# Altium PCB A3000_BigROMs.pcbdoc
Units mil, origin at the board's own origin, x right, y up, seen from the top; angles counter-clockwise.
Board outline 1725 x 3107.48 mil, 4 copper layers (TopLayer, GND, VCC, BottomLayer), stack 70.897 mil thick; 7 components, 56 nets, 144 pads, 65 vias.
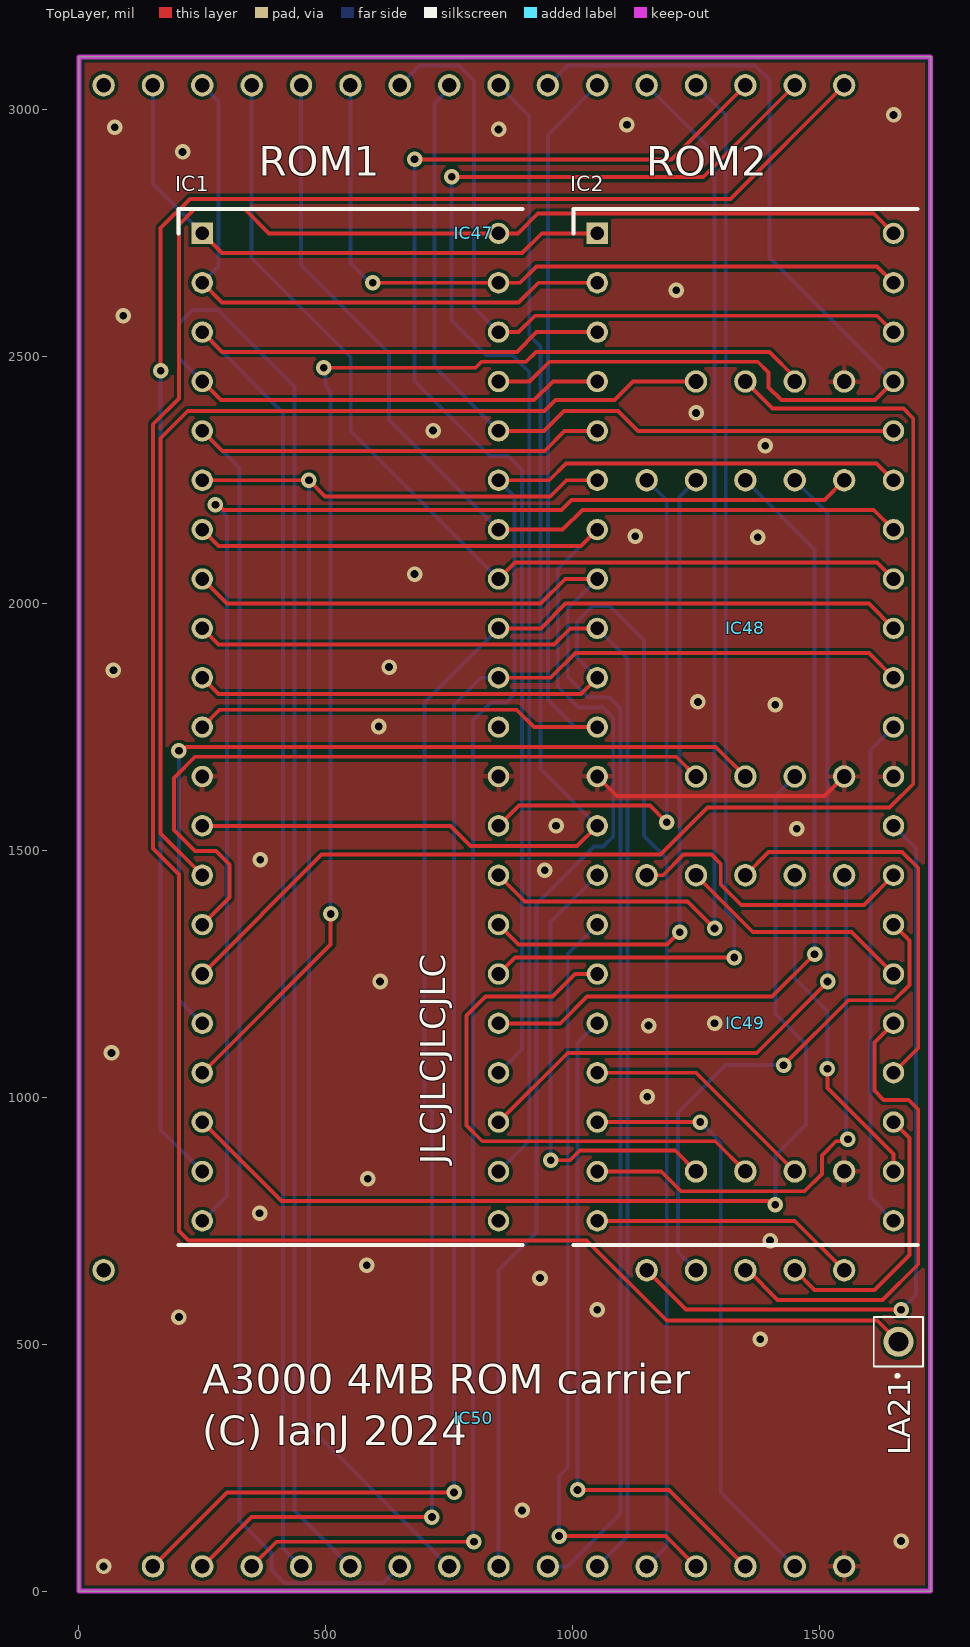
[diagram p0: TopLayer view]
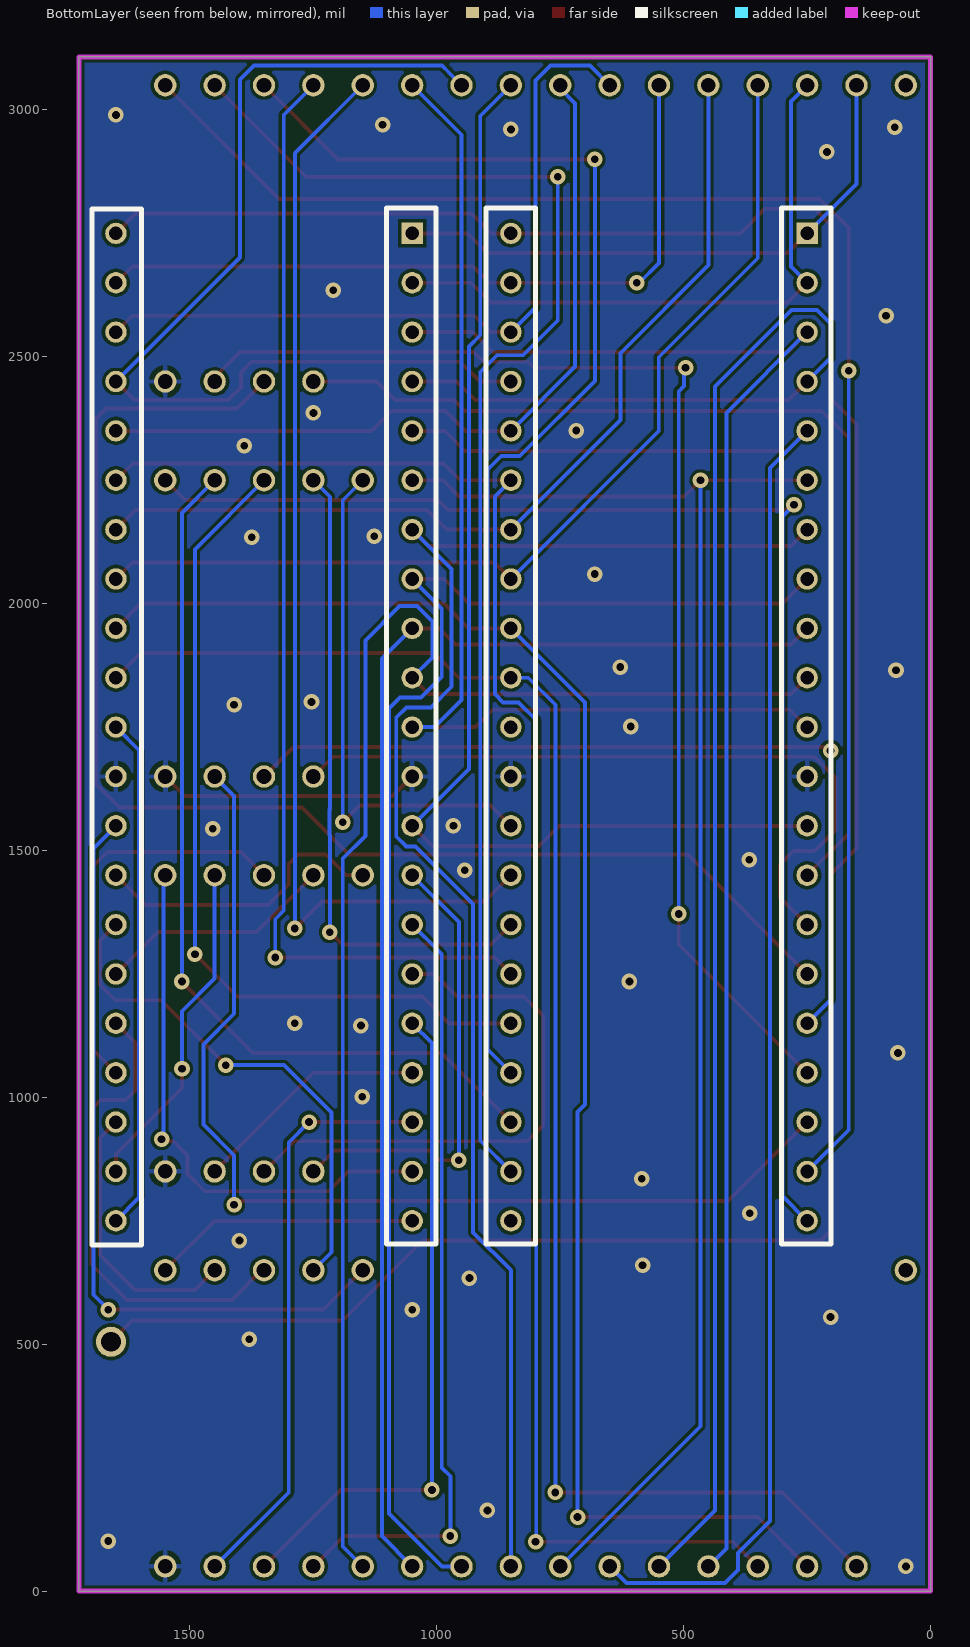
[diagram p1: BottomLayer view, seen from below]
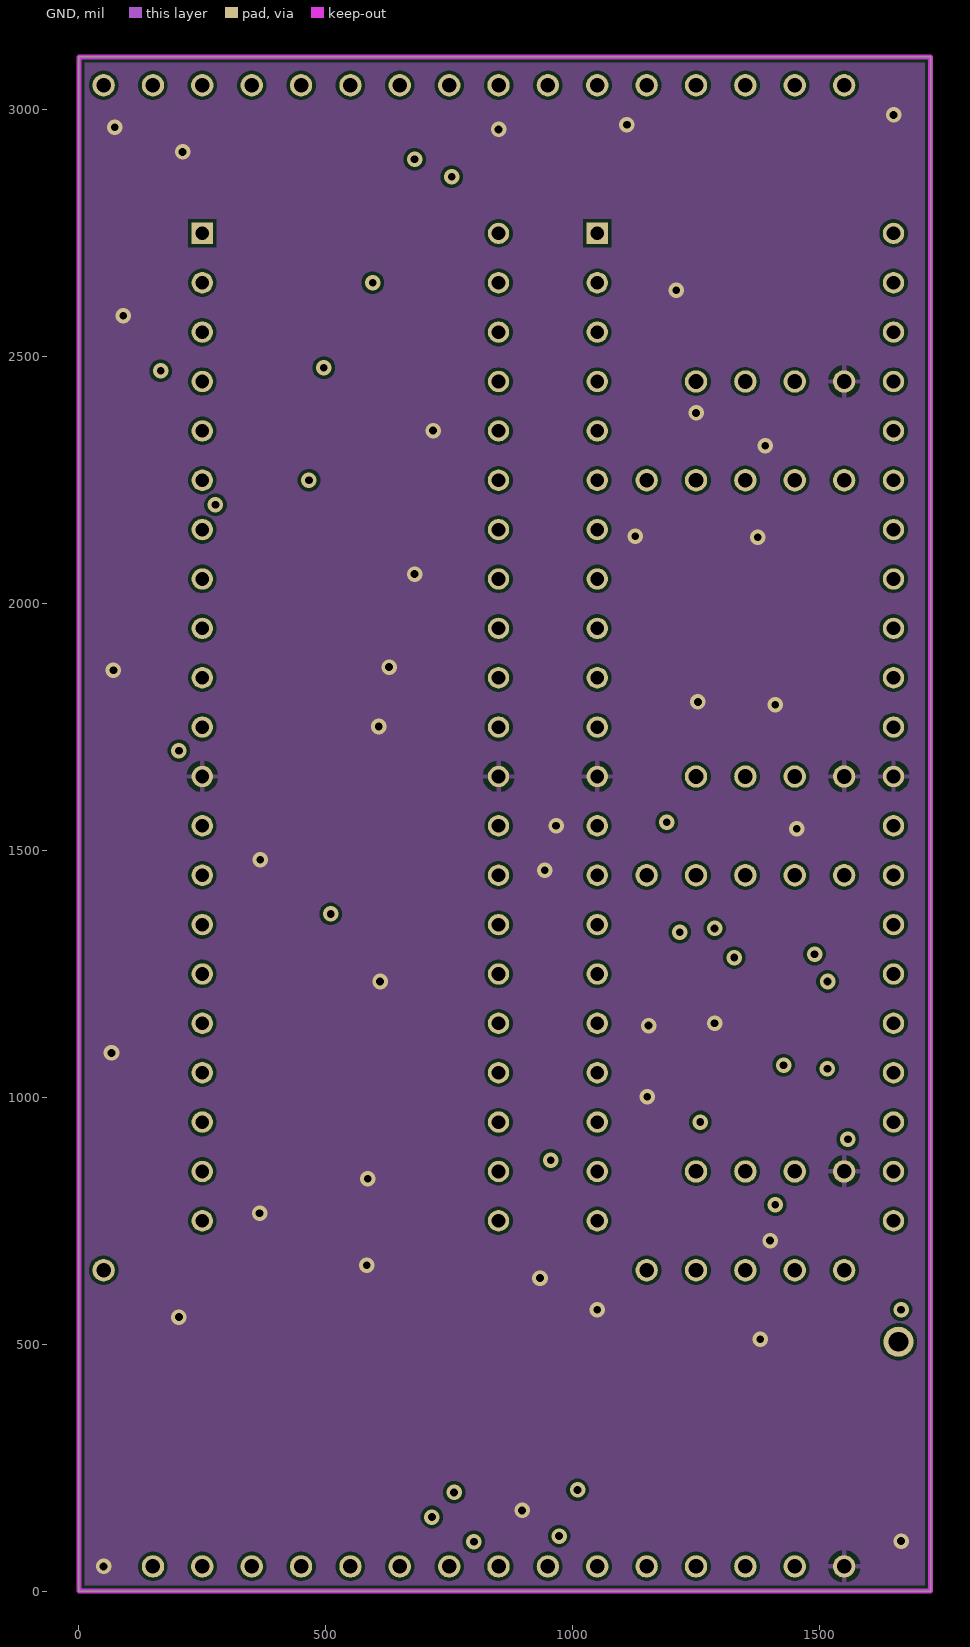
[diagram p2: GND]
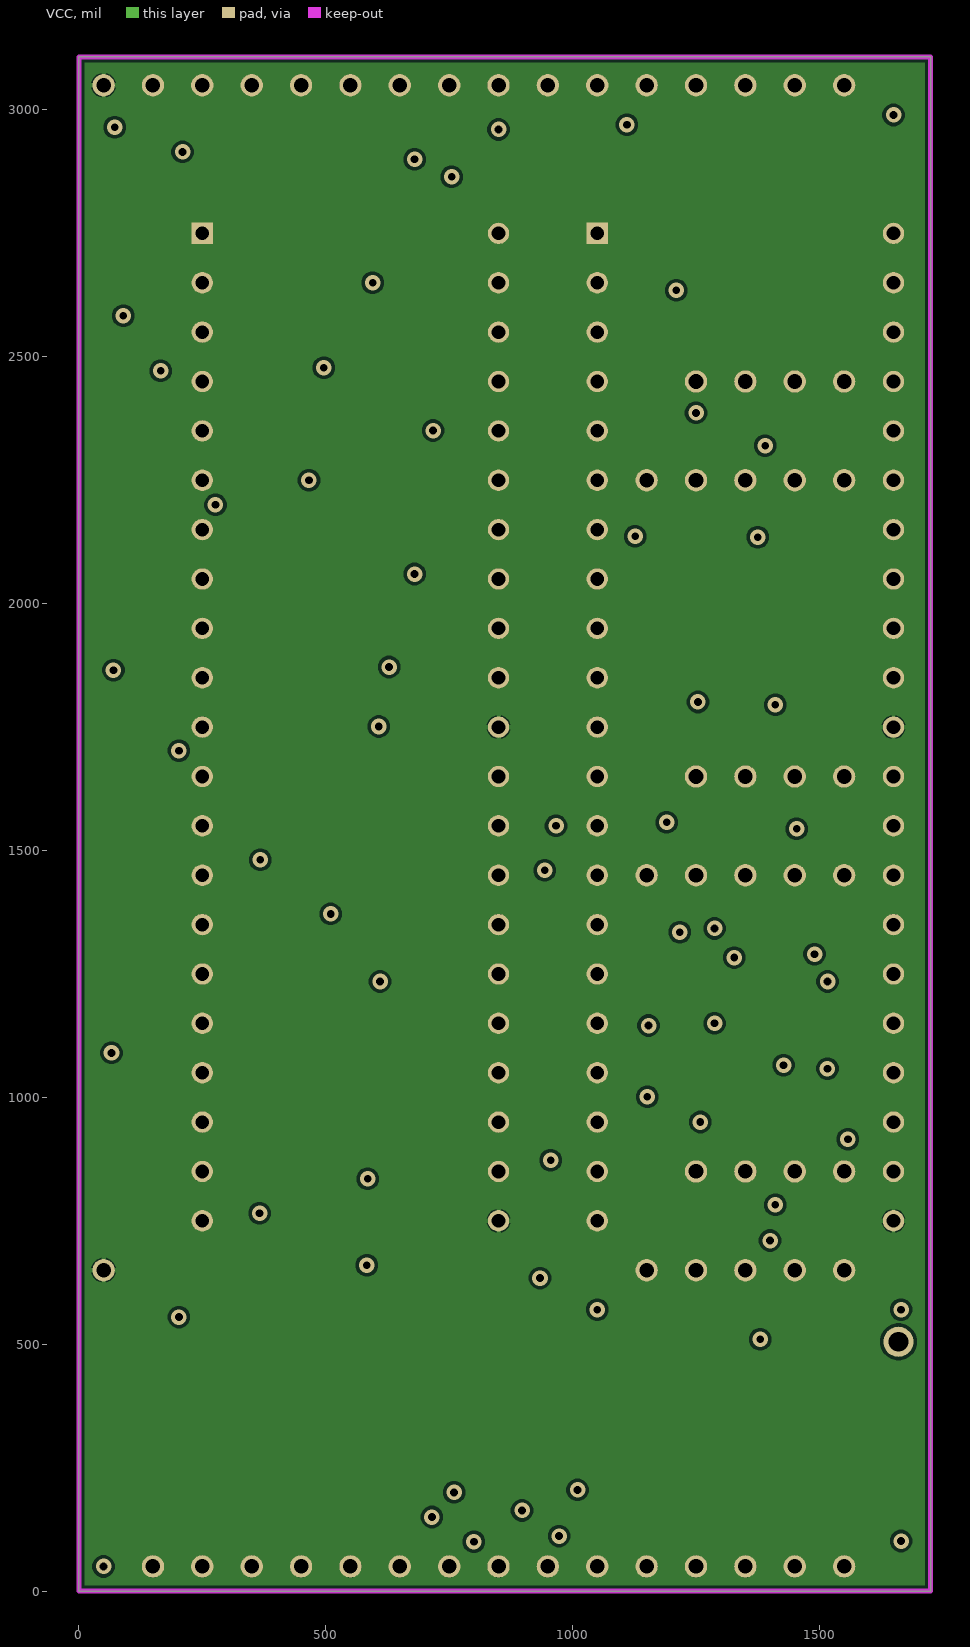
[diagram p3: VCC]

## Layer stack, top to bottom
TopSolder: solder mask 0.3941, Solder Resist, Dk 3.5
TopLayer: signal copper 1.4169
Dielectric 1: prepreg 8.2, PP-022, Dk 4.5
GND: signal copper 1.378
Dielectric 4: prepreg 2.8, PP-006, Dk 4.1
Dielectric 2: core 43.3071, Core-043, Dk 4.3
Dielectric 5: prepreg 2.8, PP-006, Dk 4.1
VCC: signal copper 1.378
Dielectric 3: prepreg 8.2, PP-022, Dk 4.5
BottomLayer: signal copper 1.4169
BottomSolder: solder mask 0.3941, Solder Resist, Dk 3.5

## Board outline
0,0 1725,0 1725,3107.48 0,3107.48

## Design rules (kind name [scope] priority, off if disabled: settings)
BoardOutlineClearance [All] p1: gap=11.81 ignorepadtopadclearanceinfootprint=FALSE
Clearance [All] p1: gap=6.69 ignorepadtopadclearanceinfootprint=FALSE except(11.81: Via-Via; 19.68: Via-Hole)
ComponentClearance ComponentClearance_Z2_Z3 [(InComponent('Z2') OR InComponent('Z3')) vs InComponent('No Component')] p1: gap=0 collisioncheckmode=3 verticalgap=0 showdistances=FALSE
ComponentClearance ComponentClearance_U4_J104 [All] p2: gap=0 collisioncheckmode=3 verticalgap=0 showdistances=FALSE
ComponentClearance ComponentClearance_J3_J4 [InComponent('J3') vs InComponent('J4')] p3: gap=0 collisioncheckmode=3 verticalgap=0 showdistances=FALSE
ComponentClearance ComponentClearance_J103_J104 [InComponent('J103') vs InComponent('J104')] p4: gap=0 collisioncheckmode=3 verticalgap=0 showdistances=FALSE
ComponentClearance [All] p5: gap=10 collisioncheckmode=3 verticalgap=10 showdistances=FALSE
DiffPairsRouting [InDifferentialPairClass('All Differential Pairs')] p1: maxlimit=10 minlimit=4.51 mostfreqgap=6.69 toplayer_mingap=6.69 toplayer_minwidth=7.87 toplayer_maxwidth=15 toplayer_prefwidth=9.32 midlayer1_prefgap=4.53 midlayer1_minwidth=15 midlayer1_maxwidth=15 midlayer1_prefwidth=15 midlayer2_prefgap=4.53 midlayer2_minwidth=15 midlayer2_maxwidth=15 midlayer2_prefwidth=15 bottomlayer_mingap=6.69 bottomlayer_minwidth=7.87 bottomlayer_maxwidth=15 bottomlayer_prefwidth=9.32 maxuncoupledlength=500
FabricationTestPointUsage TestPointUsage [All] p1: valid=0 allowmultiple=FALSE
FabricationTestpoint Testpoint [All] p1: side=3 testpointundercomponent=TRUE minsize=40 maxsize=100 preferedsize=60 minholesize=20 maxholesize=40 preferedholesize=32 testpointgrid=1 allowsidetop=TRUE allowsidebottom=TRUE usegrid=TRUE gridtolerance=0.01
HoleSize [All] p1: absolutevalues=TRUE maxlimit=196.85 minlimit=15.75 maxpercent=80.000 minpercent=20.000
HoleToHoleClearance [All] p1: gap=9.84 allowstackedmicrovias=FALSE
MinimumSolderMaskSliver [All] p1: minsoldermaskwidth=0.79
PlaneClearance [All] p1: clearance=7.87
PlaneConnect [All] p1: pad.planeconnectstyle=Relief pad.reliefexpansion=20 pad.reliefentries=4 pad.reliefconductorwidth=10 pad.reliefairgap=10 via.planeconnectstyle=Direct via.reliefexpansion=20 via.reliefentries=4 via.reliefconductorwidth=10 via.reliefairgap=10
PolygonConnect [All] p1: thpad.connectstyle=Relief thpad.reliefconductorwidth=10 thpad.reliefentries=4 thpad.polygonreliefangle="90 Angle" thpad.airgapwidth=10 smdpad.connectstyle=Relief smdpad.reliefconductorwidth=10 smdpad.reliefentries=4 smdpad.polygonreliefangle="90 Angle" smdpad.airgapwidth=10 via.connectstyle=Direct via.reliefconductorwidth=10 via.reliefentries=4 via.polygonreliefangle="90 Angle" via.airgapwidth=10
RoutingVias [All] p1: holewidth=15.75 width=31.5 viastyle="Through Hole" minholewidth=15.75 minwidth=23.62 maxholewidth=15.75 maxwidth=31.5
SilkToSilkClearance [All] p1: silktosilkclearance=3.94
SilkToSolderMaskClearance SilkscreenOverComponentPads [IsPad] p1: minsilkscreentomaskgap=3.94 clearancetoexposedcopper=TRUE
SolderMaskExpansion [All] p1: expansion=2.95 istentingtop=FALSE
Width [All] p1: maxlimit=196.85 minlimit=5.91 preferedwidth=7.87
19 further rules are at their usual default settings.

## Components (designator, comment, footprint, x,y, rotation, side; value= is the part's Value field where it differs from the comment)
IC1 "42pin DIP socket" DIPS1524W50P254L5330H420Q42N 250,2750 r0 top locked
IC2 "42pin DIP socket" DIPS1524W50P254L5330H420Q42N 1050,2750 r0 top locked
IC47 "W30532SFTRC" DIPS1524W55P254L4056H350Q32N#1 50,2450 r90 top locked
IC48 "W30532SFTRC" DIPS1524W55P254L4056H350Q32N#2 50,1650 r90 top locked
IC49 "W30532SFTRC" DIPS1524W55P254L4056H350Q32N#2 50,850 r90 top locked
IC50 "W30532SFTRC" DIPS1524W55P254L4056H350Q32N#3 50,50 r90 top locked
LA21 "LA21 patch wire" TSW-101-XX-YY-S 1660,505 r0 top (schematic designator J1)

## Footprints (in the part's own frame and the unit in brackets; to place one, negate y for a bottom-side part, rotate by r counter-clockwise, add the part's x,y. Pads: shape width x height; smd on the part's side, far side on the other; paste and mask are expansions set on the pad)
DIPS1524W50P254L5330H420Q42N [mm]
  rect 1.1x1.1 hole 0.7: 1(0,0)
  round 1.1 hole 0.7: 2(0,-2.54) 3(0,-5.08) 4(0,-7.62) 5(0,-10.16) 6(0,-12.7) 7(0,-15.24) 8(0,-17.78) 9(0,-20.32) 10(0,-22.86) 11(0,-25.4) 12(0,-27.94) 13(0,-30.48) 14(0,-33.02) 15(0,-35.56) 16(0,-38.1) 17(0,-40.64) 18(0,-43.18) 19(0,-45.72) 20(0,-48.26) 21(0,-50.8) 22(15.24,-50.8) 23(15.24,-48.26) 24(15.24,-45.72) 25(15.24,-43.18) 26(15.24,-40.64) 27(15.24,-38.1) 28(15.24,-35.56) 29(15.24,-33.02) 30(15.24,-30.48) 31(15.24,-27.94) 32(15.24,-25.4) 33(15.24,-22.86) 34(15.24,-20.32) 35(15.24,-17.78) 36(15.24,-15.24) 37(15.24,-12.7) 38(15.24,-10.16) 39(15.24,-7.62) 40(15.24,-5.08) 41(15.24,-2.54) 42(15.24,0)
  silkscreen extent -1.23,-52.05 16.47,1.25
DIPS1524W55P254L4056H350Q32N#1 [mm]
  round 1.15 hole 0.75: 13(0,-30.48) 14(0,-33.02) 15(0,-35.56) 16(0,-38.1) 17(15.24,-38.1) 18(15.24,-35.56) 19(15.24,-33.02) 20(15.24,-30.48) 21(15.24,-27.94) 22(15.24,-25.4) 23(15.24,-22.86) 24(15.24,-20.32) 25(15.24,-17.78) 26(15.24,-15.24) 27(15.24,-12.7) 28(15.24,-10.16) 29(15.24,-7.62) 30(15.24,-5.08) 31(15.24,-2.54) 32(15.24,0)
DIPS1524W55P254L4056H350Q32N#2 [mm]
  round 1.15 hole 0.75: 13(0,-30.48) 14(0,-33.02) 15(0,-35.56) 16(0,-38.1) 17(15.24,-38.1) 18(15.24,-35.56) 19(15.24,-33.02) 20(15.24,-30.48) 21(15.24,-27.94)
DIPS1524W55P254L4056H350Q32N#3 [mm]
  round 1.15 hole 0.75: 2(0,-2.54) 3(0,-5.08) 4(0,-7.62) 5(0,-10.16) 6(0,-12.7) 7(0,-15.24) 8(0,-17.78) 9(0,-20.32) 10(0,-22.86) 11(0,-25.4) 12(0,-27.94) 13(0,-30.48) 14(0,-33.02) 15(0,-35.56) 16(0,-38.1) 17(15.24,-38.1) 18(15.24,-35.56) 19(15.24,-33.02) 20(15.24,-30.48) 21(15.24,-27.94) 32(15.24,0)
TSW-101-XX-YY-S [mm]
  round 1.55 hole 1.02: 1(0,0)
  silkscreen extent -1.27,-1.8 1.27,1.27

## Part data
IC1 IC2: library part 110-87-642-41-001101, "Connector", Manufacturer_Name=Preci-Dip, Mouser Part Number=437-1108764241001101, Datasheet Link=http://www.precidip.com/AppHost/9698,1/Scripts/Modules/Catalog/Default.aspx?c=14&i=121&p=23&pdf=1&dsku=110-PP-XXX-41-001101, Height=4.2mm, Manufacturer_Part_Number=110-87-642-41-001101, Mouser Price/Stock=https://www.mouser.com/Search/Refine.aspx?Keyword=437-1108764241001101
IC47 IC48 IC49 IC50: "Connector", Manufacturer_Name=Winslow, Height=3.5mm, Manufacturer_Part_Number=W30532SFTRC
LA21: library part TSW-101-07-G-S, "Connector", Manufacturer_Name=SAMTEC, Mouser Part Number=200-TSW10107GS, Arrow Part Number=TSW-101-07-G-S, Arrow Price/Stock=https://www.arrow.com/en/products/tsw-101-07-g-s/samtec?region=europe, Datasheet Link=http://suddendocs.samtec.com/prints/tsw-xxx-xx-xxx-x-xx-xxx-mkt.pdf, Manufacturer_Part_Number=TSW-101-07-G-S, Mouser Price/Stock=https://www.mouser.co.uk/ProductDetail/Samtec/TSW-101-07-G-S?qs=hzq9O0YpnZscfPe5oPvABA%3D%3D

## Via types
v1: diameter 31.5, hole 15.75, TopLayer to BottomLayer, tented both sides, 65 vias

## Nets (pads, with @x,y where several pads share a name; then routed paths per layer and width w, separated by ;. In a path a pad name is that pad's centre, name@x,y a point inside that pad or via, vN(x,y) a via of type N, cw(c..) or ccw(c..) an arc to the next point about the centre after c; other vN are vias at no path point)
A2: IC1.10 IC2.10 IC50.12 | length 3046.9
  TopLayer w7.87: IC1.10 282.84,1817.16 1017.16,1817.16 IC2.10
  BottomLayer w7.87: IC2.10 1008.86,1891.14 1008.86,1963.67 1040.19,1995 1075.31,1995 1144.87,1925.44 1144.87,1529.29 1190.58,1483.58 1190.58,90.58 IC50.12
A3: IC1.9 IC2.9 IC50.11 | length 2778.1
  TopLayer w7.87: IC1.9 282.84,1917.16 962.32,1917.16 995.16,1950 IC2.9
  BottomLayer w7.87: IC50.11 1111.42,111.42 1111.42,1888.58 IC2.9
A4: IC1.8 IC2.8 IC50.10 | length 3019.6
  TopLayer w7.87: IC1.8 300,2000 935,2000 985,2050 IC2.8
  BottomLayer w7.87: IC50.10 989.59,50 1096.85,157.26 1096.85,1787.77 1074.62,1810 1031.71,1810 990.16,1851.55 990.16,1990.16 IC2.8
A5: IC1.7 IC2.7 IC50.9 | length 3143.7
  TopLayer w7.87: IC1.7 282.84,2117.16 1017.16,2117.16 IC2.7
  BottomLayer w7.87: IC50.9 850,650 926.72,726.72 926.72,1391.56 1043.32,1508.16 1062.8,1508.16 1062.8,1508.86 1082.28,1528.35 1082.28,1769.37 1061.65,1790 1011.71,1790 970,1831.71 970,2070 IC2.7
A6: IC1.6 IC2.6 IC50.8 | length 3144.8
  TopLayer w7.87: IC1.6 v1(466.01,2250) 498.85,2217.16 954.82,2217.16 987.66,2250 IC2.6
  BottomLayer w7.87: v1(466.01,2250) 466.01,333.99 IC50.8
A7: IC1.5 IC2.5 IC50.7 | length 3484
  TopLayer w7.87: IC1.5 290.43,2309.57 943.48,2309.57 983.91,2350 IC2.5
  BottomLayer w7.87: IC1.5 325,2275 325,141.95 390,76.95 390,42.36 416.2,16.16 616.16,16.16 IC50.7
A8: IC1.4 IC2.4 IC50.6 | length 3715.2
  TopLayer w7.87: IC1.4 287.84,2412.16 922.16,2412.16 960,2450 IC2.4
  BottomLayer w7.87: IC1.4 202.58,2497.42 202.58,2567.58 230,2595 281.73,2595 436.58,2440.15 436.58,163.42 IC50.6
A9: IC1.3 IC2.3 IC50.5 | length 3416
  TopLayer w7.87: IC1.3 290,2510 887.18,2510 927.18,2550 IC2.3
  BottomLayer w7.87: IC1.3 413.58,2386.42 413.58,86.42 IC50.5
A10: IC1.41 IC2.41 IC47.27 | length 1504
  TopLayer w7.87: v1(595,2650) IC1.41 893.83,2650 926.98,2683.16 1616.84,2683.16 IC2.41
  BottomLayer w7.87: IC47.27 550,2690 590,2650 v1(595,2650)
A11: IC1.40 IC2.40 IC47.26 | length 1537.2
  TopLayer w7.87: IC1.40 890.5,2550 923.65,2583.16 1616.84,2583.16 IC2.40
  BottomLayer w7.87: IC47.26 690,3090 770,3090 800,3060 800,2600 IC1.40
A12: IC1.39 IC2.39 IC47.23 | length 2074.8
  TopLayer w7.87: IC1.39 912.93,2450 952.93,2490 1375,2490 1396.85,2468.15 1396.85,2438.15 1422.84,2412.16 1612.16,2412.16 IC2.39
  BottomLayer w7.87: IC47.23 975.91,3075.91 975.91,3076.3 989.61,3090 1370,3090 1398.69,3061.31 1398.69,2701.31 IC2.39
A13: IC1.38 IC2.38 IC47.25 | length 1599.4
  TopLayer w7.87: IC1.38 942.29,2350 982.29,2390 1092.27,2390 1132.27,2350 IC2.38
  BottomLayer w7.87: IC47.25 750,3043.26 720,3013.26 720,2480 IC1.38
A14: IC1.37 IC2.37 IC50.4 | length 3516.3
  TopLayer w7.87: IC50.4 400,100 v1(800,100) ; IC1.37 952.66,2250 986.82,2284.16 1615.84,2284.16 IC2.37
  BottomLayer w7.87: v1(800,100) 798.58,101.42 798.58,1752.16 798.58,1764.1 834.48,1800 865.86,1800 882.58,1816.72 882.58,1836.16 882.58,2217.42 IC1.37
A15: IC1.36 IC2.36 IC47.28 | length 1898.8
  TopLayer w7.87: IC1.36 979.85,2150 1019.85,2190 1610,2190 IC2.36
  BottomLayer w7.87: IC47.28 450,2685.58 628.35,2507.24 628.35,2371.65 IC1.36
A16: IC1.35 IC2.35 IC47.29 | length 2034.6
  TopLayer w7.87: IC1.35 883.16,2083.16 1616.84,2083.16 IC2.35
  BottomLayer w7.87: IC47.29 350,2699.69 550.58,2499.11 550.58,2349.42 IC1.35
A17: IC1.34 IC2.34 IC50.3 | length 3216.2
  TopLayer w7.87: IC50.3 350,150 v1(715,150) ; IC1.34 935.58,1950 985.58,2000 1600,2000 IC2.34
  BottomLayer w7.87: v1(715,150) 715,970.7 700,985.7 700,1800 IC1.34
A18: IC1.33 IC2.33 IC50.2 | length 3221.5
  TopLayer w7.87: IC50.2 300,200 v1(760,200) ; IC1.33 955.58,1850 1005.58,1900 1600,1900 IC2.33
  BottomLayer w7.87: v1(760,200) 760,1795.2 814.8,1850 IC1.33
A19: IC1.2 IC2.2 IC47.30 | length 1260.1
  TopLayer w7.87: IC1.2 290,2610 890.65,2610 930.65,2650 IC2.2
  BottomLayer w7.87: IC1.2 282.58,2682.58 282.58,3017.42 IC47.30
A20: IC1.1 IC2.1 IC47.31 | length 1174.6
  TopLayer w7.87: IC1.1 290,2710 897.47,2710 937.47,2750 IC2.1
  BottomLayer w7.87: IC47.31 150,2850 IC1.1
A21: IC1.42 IC2.42 LA21.1 | length 5147.1
  TopLayer w7.87: IC2.42 1610,2790 929.47,2790 889.47,2750 IC1.42 385,2750 335,2800 235,2800 202.34,2767.34 202.34,2760.82 202.58,2760.58 202.58,2415.93 150,2363.35 150,1503.89 202.58,1451.31 202.58,729.23 221.82,710 1028.47,710 1190.58,547.89 1617.11,547.89 LA21.1
D0: IC1.14 IC47.13 | length 2052.1
  TopLayer w7.87: IC1.14 165.58,1534.42 165.58,2335.16 220.43,2390 943.42,2390 965.58,2412.16 1084.48,2412.16 1122.32,2450 IC47.13
D1: IC1.16 IC47.14 | length 2710.8
  TopLayer w7.87: IC1.16 491.58,1491.58 1177.78,1491.58 1273.35,1587.16 1642.16,1587.16 1690,1635 1690,2375.44 1670.44,2395 1405,2395 IC47.14
D2: IC1.18 IC47.15 | length 2539.4
  TopLayer w7.87: IC1.18 510,1310 v1(510,1371.65) ; v1(496.15,2477.88) 803.08,2477.88 815.2,2490 905.51,2490 925.51,2510 1398.69,2510 1450,2458.69 IC47.15
  BottomLayer w7.87: v1@498.85,2480 499.16,2479.69 499.16,2440.88 510,2430.04 v1(510,1371.65)
D3: IC1.20 IC47.17 | length 3449.8
  TopLayer w7.87: v1(165.58,2471.65) 165.58,2760.58 225,2820 1320,2820 IC47.17
  BottomLayer w7.87: v1(165.58,2471.65) 165.58,934.42 IC1.20
D4: IC1.23 IC47.18 | length 2908
  TopLayer w7.87: v1(755,2864.53) 1264.53,2864.53 IC47.18
  BottomLayer w7.87: v1(755,2864.53) 755,2573.58 825.43,2503.15 878.01,2503.15 912.15,2469.01 912.15,912.15 IC1.23
D5: IC1.25 IC47.19 | length 2713.9
  TopLayer w7.87: v1(680,2900) 1200,2900 IC47.19
  BottomLayer w7.87: v1(680,2900) 680,2451.32 832.16,2299.16 869.58,2299.16 897.58,2271.16 897.58,1097.58 IC1.25
D6: IC1.27 IC47.20 | length 2290
  TopLayer w7.87: IC1.27 883.16,1283.16 v1(1327.36,1283.16)
  BottomLayer w7.87: IC47.20 1310.09,2989.91 1310.09,1378.14 1327.36,1360.87 v1(1327.36,1283.16)
D7: IC1.29 IC47.21 | length 2247.1
  TopLayer w7.87: IC1.29 903.15,1396.85 1232.89,1396.85 v1(1287.58,1342.16)
  BottomLayer w7.87: IC47.21 1287.58,2912.42 v1(1287.58,1342.16)
D8: IC1.15 IC48.13 | length 1483.3
  TopLayer w7.87: IC1.15 305,1405 305,1471.71 277.55,1499.16 234.82,1499.16 192.57,1541.41 192.57,1647.14 235.42,1690 1210,1690 IC48.13
D9: IC1.17 IC48.14 | length 1747.3
  TopLayer w7.87: v1(202.58,1702.16) 208.97,1702.16 216.82,1710 1290,1710 IC48.14
  BottomLayer w7.87: v1(202.58,1702.16) 202.58,1197.42 IC1.17
D10: IC1.19 IC48.15 | length 2165.3
  TopLayer w7.87: IC1.19 410,790 1396.61,790 1404.19,782.42 v1(1410.58,782.42)
  BottomLayer w7.87: v1(1410.58,782.42) 1410.58,882.76 1472.64,944.81 1472.64,1107.36 1410.58,1169.42 1410.58,1309.54 1410.58,1610.58 IC48.15
D11: IC1.21 IC48.17 | length 2783.1
  TopLayer w7.87: v1(276.57,2200.16) 282.97,2200.16 293.12,2190 359.2,2190 977.5,2190 997.5,2210 1510,2210 IC48.17
  BottomLayer w7.87: IC1.21 300,800 300,2176.73 v1(276.57,2200.16)
D12: IC1.24 IC48.18 | length 1827.7
  TopLayer w7.87: IC1.24 990.16,1090.16 1372.88,1090.16 1516.38,1233.66 v1(1516.38,1234.69)
  BottomLayer w7.87: IC48.18 1516.38,2183.62 v1(1516.38,1234.69)
D13: IC1.26 IC48.19 | length 1716
  TopLayer w7.87: IC1.26 975,1150 1029.21,1204.21 1404.21,1204.21 v1(1490,1290)
  BottomLayer w7.87: IC48.19 1490,2110 v1(1490,1290)
D14: IC1.28 IC48.20 | length 1324.1
  TopLayer w7.87: IC1.28 890.46,1309.54 1191.43,1309.54 1216.58,1334.69 v1(1216.96,1334.69)
  BottomLayer w7.87: v1(1216.96,1334.69) 1216.58,1335.07 1216.58,1530.39 1217.32,1531.12 1217.32,1583.14 1216.58,1583.88 1216.58,2216.58 IC48.20
D15: IC1.30 IC48.21 | length 1081.4
  TopLayer w7.87: IC1.30 891.16,1591.16 1156.58,1591.16 v1(1190.58,1557.16)
  BottomLayer w7.87: IC48.21 1190.58,2209.42 v1(1190.58,1557.16)
D16: IC2.14 IC49.13 | length 937.7
  TopLayer w7.87: v1(955.58,872.64) 995,872.64 1014.52,892.16 1207.84,892.16 IC49.13
  BottomLayer w7.87: v1@955,872.06 v1(955.58,872.64) 955,873.22 955,1355 IC2.14
D17: IC2.16 IC49.14 | length 1125.7
  TopLayer w7.87: IC2.16 1005,1250 959.21,1204.21 823.88,1204.21 785.15,1165.48 785.15,943.04 817.09,911.1 1288.9,911.1 IC49.14
D18: IC2.18 IC49.15 | length 482.8
  TopLayer w7.87: IC2.18 1250,1050 IC49.15
D19: IC2.20 IC49.17 | length 1127.7
  TopLayer w7.87: IC2.20 1179.56,850 1219.56,810 1470,810 1505,845 1505,882.64 1533.46,911.1 1553.42,911.1 v1(1557.55,915.23)
  BottomLayer w7.87: IC49.17 1553.78,1446.22 1553.78,919 v1(1557.55,915.23)
D20: IC2.23 IC49.18 | length 682.8
  TopLayer w7.87: v1(1516.16,1058.16) 1516.16,1018.84 1650,885 IC2.23
  BottomLayer w7.87: IC49.18 1450,1240.72 1516.16,1174.56 v1(1516.16,1058.16)
D21: IC2.25 IC49.19 | length 817.9
  TopLayer w7.87: IC49.19 1396.85,1496.85 1667.48,1496.85 1700,1464.33 1700,1100 IC2.25
D22: IC2.27 IC49.20 | length 482.8
  TopLayer w7.87: IC49.20 1364.93,1335.07 1564.93,1335.07 IC2.27
D23: IC2.29 IC49.21 | length 608.4
  TopLayer w7.87: IC49.21 1183.35,1450 1224.93,1491.58 1281.42,1491.58 1300,1473 1300,1431.58 1341.58,1390 1590,1390 IC2.29
D24: IC2.15 IC50.13 | length 1573.4
  TopLayer w7.87: v1(972.64,111.42) 1188.58,111.42 IC50.13
  BottomLayer w7.87: v1(972.64,111.42) 972.64,232.64 990.16,250.16 990.16,1290.16 995.16,1295.16 IC2.15
D25: IC2.17 IC50.14 | length 1365.8
  TopLayer w7.87: v1(1010,205) 1195,205 IC50.14
  BottomLayer w7.87: v1(1010,205) 1010,1110 IC2.17
D26: IC2.19 IC50.15 | length 1188
  TopLayer w7.87: IC2.19 v1(1258.74,950)
  BottomLayer w7.87: v1(1258.74,950) 1300,908.74 1300,200 IC50.15
D27: IC2.21 IC50.17 | length 541.4
  TopLayer w7.87: IC2.21 1450,750 IC50.17
D28: IC2.24 IC50.18 | length 561
  TopLayer w7.87: IC50.18 1490,610 1611.43,610 1682.58,681.15 1682.58,917.42 IC2.24
D29: IC2.26 IC50.19 | length 975
  TopLayer w7.87: IC50.19 1355.27,650 1415.27,590 1627.95,590 1700,662.05 1700,975.75 1680.75,995 1630,995 1611.43,1013.57 1611.43,1111.43 IC2.26
D30: IC2.28 IC50.20 | length 1045.7
  TopLayer w7.87: v1(1427.36,1065.31) 1558.9,1196.85 1651.28,1196.85 1682.28,1227.86 1682.28,1317.72 IC2.28
  BottomLayer w7.87: IC50.20 1213.58,686.42 1213.58,969.22 1309.67,1065.31 v1(1427.36,1065.31)
D31: IC2.30 IC50.21 | length 1559.9
  TopLayer w7.87: IC50.21 1230,570 v1(1665.31,570)
  BottomLayer w7.87: IC2.30 1695.58,1504.42 1695.58,600.27 v1(1665.31,570)
GND: IC1.12 IC1.31 IC2.12 IC2.31 IC47.16 IC48.16 IC49.16 IC50.16 | length 532.7
  TopLayer w7.87: IC2.12 1089.42,1610.58 1510.58,1610.58 IC48.16
  other v1: 50,50 1665.31,101.42 897.58,163.42 1380,510 202.58,555 1050,570 933.99,633.99 583.26,659.99 1399.87,709.99 366.01,765.31 585,835 1151.29,1001.23 66.01,1090.16 1153.86,1145.54 1287.58,1150 610,1234.69 943.48,1460 367.43,1481.23 1453.86,1543.94 966.47,1550 607.43,1751.23 1410.58,1795.2 1253.86,1800.94 70,1865.31 628.35,1871.65 680,2060 1375,2134.69 1126.65,2136.38 1390,2320 717.43,2350.65 1250,2386.42 90,2583.16 1210,2634.69 210,2915 850,2960.54 72.64,2965 1110,2970 1650,2989.91
OE: IC1.13 IC2.13 IC47.24 | length 2416.9
  TopLayer w7.87: IC1.13 752.31,1550 793.44,1508.86 1008.86,1508.86 IC2.13
  BottomLayer w7.87: IC47.24 912.15,2987.85 912.15,2543.59 934.58,2521.16 934.58,1665.42 IC2.13
ROMCS: IC1.11 IC2.11 IC47.22 | length 2238.5
  TopLayer w7.87: IC1.11 285.16,1785.16 886.74,1785.16 921.9,1750 IC2.11
  BottomLayer w7.87: IC2.11 1005,1750 949.82,1805.18 949.82,2949.82 IC47.22
VCC: IC1.22 IC1.32 IC2.22 IC2.32 IC47.32 IC50.32 | length 1038.8
  BottomLayer w7.87: IC2.22 1603.15,796.85 1603.15,1703.15 IC2.32

## Polygon pours and split planes (outlines as drawn)
GND on GND "NONET_L-01_P-001" (solid, pour order 0): 0,0 1725,0 1725,3107.48 0,3107.48
VCC on VCC "NONET_L-01_P-001" (solid, pour order 2): 0,0 1725,0 1725,3107.48 0,3107.48
GND on BottomLayer "NONET_L-01_P-001" (solid, remove dead copper, pour order 3): 0,0 1725,0 1725,3107.48 0,3107.48
GND on TopLayer "NONET_L-01_P-001" (solid, remove dead copper, pour order 1): 0,0 1725,0 1725,3107.48 0,3107.48

## Keep-outs
KeepOutLayer:
  the board outline again, w10

## Silkscreen, mask and mechanical layers (free items; w line width, h text height)
TopOverlay:
  text "ROM1" at 364.27,2866.87 h60
  text "ROM2" at 1149.37,2866.87 h60
  text "JLCJLCJLCJLC" at 742.31,865 h50 r90
  text "A3000 4MB ROM carrier" at 250,400 h60
  text "(C) IanJ 2024" at 250,295 h60
BottomOverlay:
  lines w10: 201.9,703.34 301.9,703.34 301.9,2801.77 201.9,2801.77 201.9,703.34 ; 800.32,703.34 900.32,703.34 900.32,2801.77 800.32,2801.77 800.32,703.34 ; 1001.9,703.34 1101.9,703.34 1101.9,2801.77 1001.9,2801.77 1001.9,703.34 ; 1598.43,700.79 1698.43,700.79 1698.43,2799.21 1598.43,2799.21 1598.43,700.79
Board Outline:
  the board outline again, w10